# Altium PCB Group31 B_L D_T.PcbDoc (part 2 of 2)
Units mil, origin at the board's own origin, x right, y up, seen from the top; angles counter-clockwise.
Board outline 2519.68 x 3346.46 mil, 4 copper layers (Top Side, Ground Plane, Power Plane, Bottom Side), stack 33.234 mil thick; 87 components, 64 nets, 291 pads, 74 vias.
Unrouted connection lines stored in the file: 2.
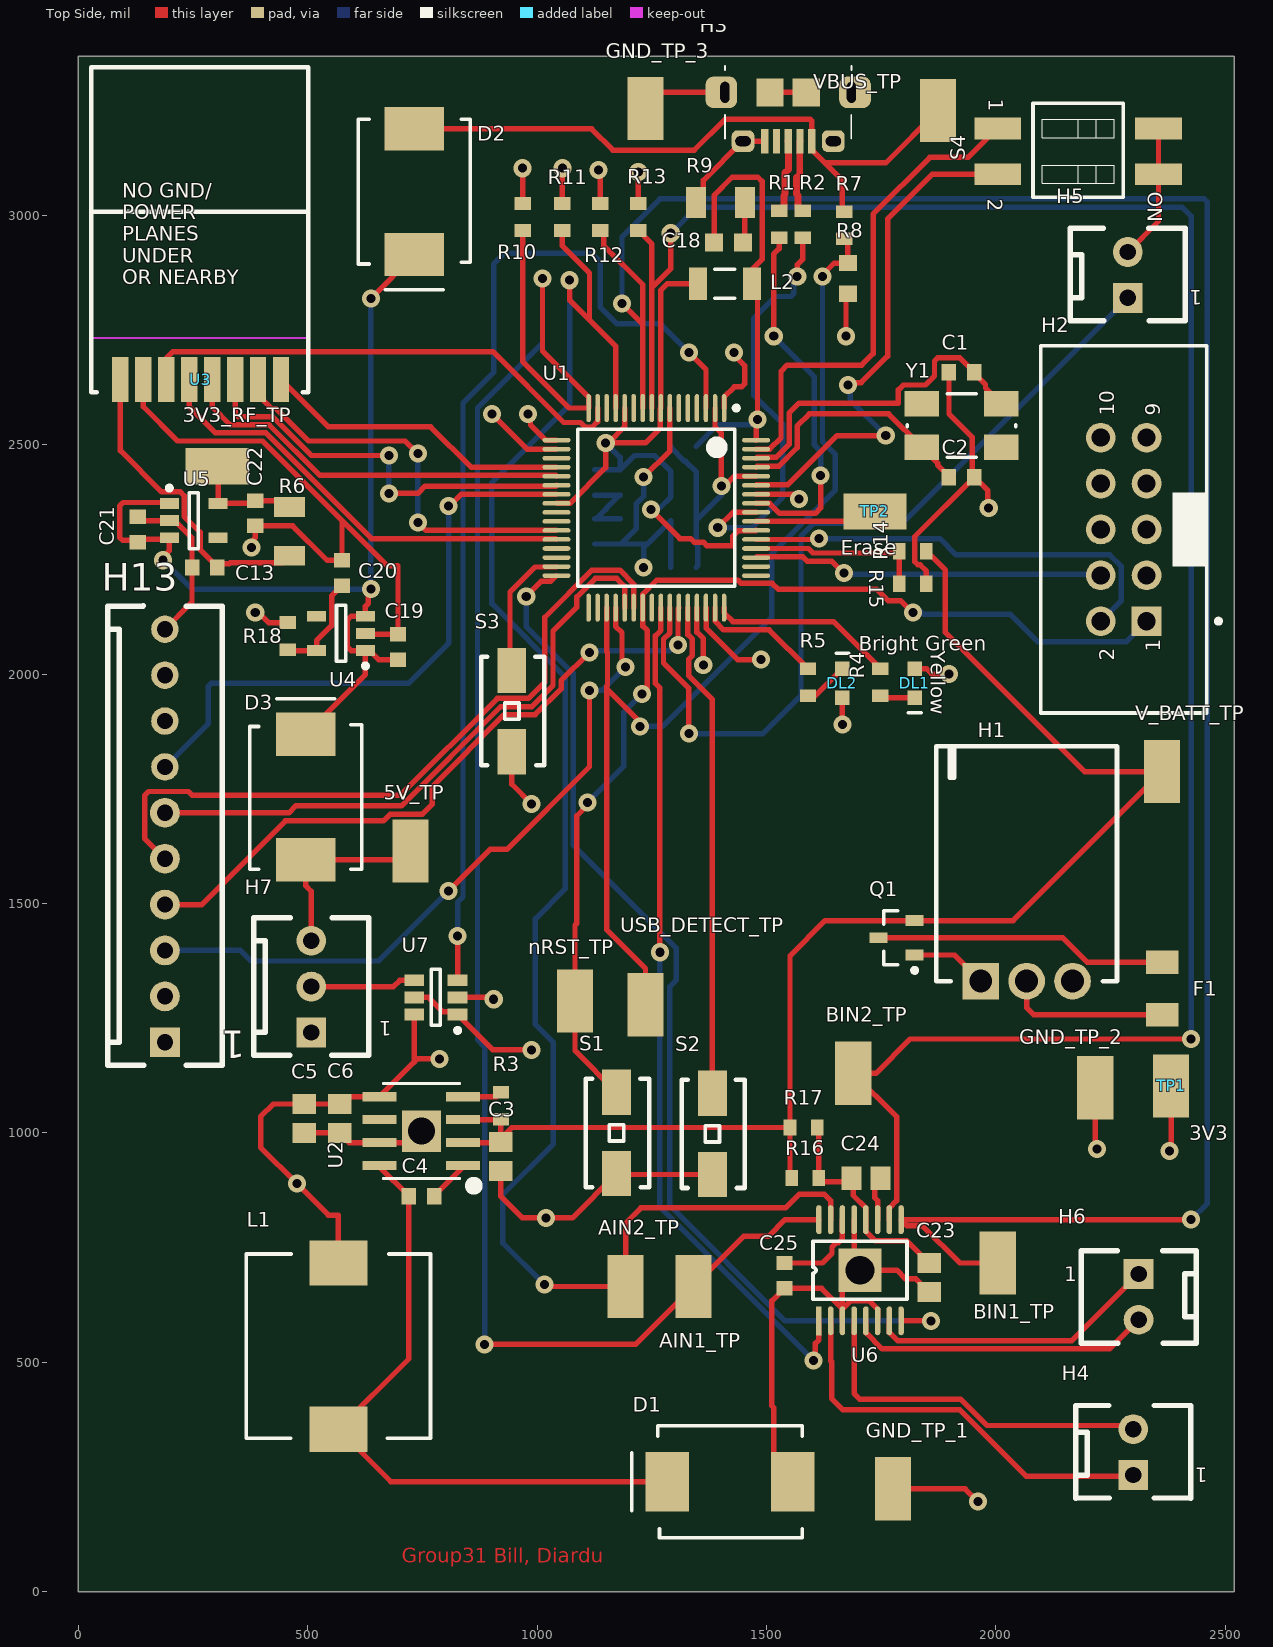
[diagram p0: Top Side view]

## Via types
v1: diameter 39.37, hole 19.68, Top Side to Bottom Side, 72 vias
v2: diameter 86.61, hole 62.99, Top Side to Bottom Side, 1 vias
v3: diameter 78.74, hole 59.06, Top Side to Bottom Side, 1 vias

## Nets (pads, with @x,y where several pads share a name; then routed paths per layer and width w, separated by ;. In a path a pad name is that pad's centre, name@x,y a point inside that pad or via, vN(x,y) a via of type N, cw(c..) or ccw(c..) an arc to the next point about the centre after c; other vN are vias at no path point) (continued)
USB_DETECT: (continued)
  Bottom Side w11.81: v1(1224.41,1885.83) 1272.89,1885.83 1511.81,2124.75 1511.81,2262.51 1649.61,2400.31 1649.61,2479.08 1622.05,2506.64 v1(1622.05,2866.14)
V_BAT: C3.2 Q1.2 R3.2 R14.2 R16.2 R17.2 U2.2 U2.3 V_BATT_TP.1 | length 3109.7
  Top Side w11.81: U2.2 919.88,978.94 C3.2 C3.2@921.26,988.19 ; U2.3 920.67,1028.94 R3.2 C3.2@921.26,988.19 ; R16.2 1551.18,905.51 R17.2 ; R14.2 1889.76,2226.38 1889.76,2090.55 2192.91,1787.4 V_BATT_TP.1 2037.4,1462.6 Q1.2 1627.95,1462.6 1551.18,1385.83 R17.2 ; C3.2@921.26,988.19 944.88,1011.81 R17.2
VBUS: D2.1 H3.1 R7.2 VBUS_TP.1 | length 1435.8
  Top Side w11.81: D2.1 1119.09,3187.99 1165.35,3141.73 1342.52,3141.73 1409.45,3208.66 1595.44,3208.66 1598.4,3205.71 1598.4,3161.45 1598.43,3142.72 1626.97,3114.17 ; R7.2 1665.35,3011.81 1665.35,3075.79 1626.97,3114.17 ; VBUS_TP.1 1759.84,3114.17 1626.97,3114.17
WKNP: S3.1 U1.31 | length 296.7
  Top Side w11.81: S3.1 940.94,2011.81 940.94,2178.4 995.81,2233.27 1041.34,2233.27 U1.31
pads on no net: H2.3 H2.9 H2.10 H3.4 H13.8 U1.4 U1.5 U1.6 U1.11 U1.14 U1.19 U1.25 U1.26 U1.29 U1.30 U1.33 U1.34 U1.40 U1.49 U1.50 U2.6 U4.4 U5.4 Y1.2 Y1.4

## Polygon pours and split planes (outlines as drawn)
GND on Ground Plane (split plane): 2499.59,20.1 20.1,20.1 20.1,3326.36 31.5,2744.09 606.3,2744.09 606.3,3322.83 23.62,3322.83 20.1,3326.36 2499.59,3326.36
3V3 on Power Plane (split plane): 2499.59,20.1 20.1,20.1 20.1,605.14 968.5,605.14 970.45,605.53 972.11,606.63 973.21,608.29 973.6,610.24 973.21,612.19 972.11,613.84 957.85,628.1 957.85,1673.23 957.47,1675.18 956.36,1676.83 873.68,1759.51 872.03,1760.62 870.08,1761 20.1,1761 20.1,3326.36 32.21,3326.36 28.68,3322.83 23.62,2744.09 606.3,2744.09 606.3,3326.36 2499.59,3326.36
5V on Power Plane (split plane): 947.66,1671.12 947.66,625.98 948.05,624.03 949.15,622.38 956.2,615.33 20.1,615.33 20.1,1749.11 21.8,1750.81 867.97,1750.81

## Other copper
Top Side:
  pour cut-out: 28.68,3322.83 598.43,3322.83 610.24,3311.02 610.24,2740.16 31.5,2740.16 27.56,2744.09
  text "Group31 Bill, Diardu" at 704.72,62.99 h31.5
Bottom Side:
  pour cut-out: 28.68,3322.83 606.3,3322.83 606.3,2740.16 27.56,2740.16 23.62,2744.09
Ground Plane (plane layer: these items are gaps in the copper):
  region: 539.37,3106.3
  pour cut-out: 20.1,3326.36 23.62,3322.83 606.3,3322.83 606.3,2744.09 31.5,2744.09
Power Plane (plane layer: these items are gaps in the copper):
  pour cut-out: 28.68,3322.83 32.62,3326.77 606.3,3326.77 606.3,2744.09 23.62,2744.09
  lines w10: 15.75,610.24 968.5,610.24 952.76,625.98 952.76,1673.23 870.08,1755.91 19.68,1755.91 15.75,1751.97

## Silkscreen, mask and mechanical layers (free items; w line width, h text height)
Board Outline:
  the board outline again, w10

## Dimensions
0,3385.83 to 2519.68,3385.83 on Mechanical 1
2559.06,3346.46 to 2559.06,0 on Mechanical 1

## Text inside footprints (layer, text, board x,y; h text height)
H2: Top Overlay "2" at 2257.87,2028.53 h31.5 r90; Top Overlay "1" at 2357.87,2048.21 h31.5 r90; Top Overlay "10" at 2257.87,2562.38 h31.5 r90; Top Overlay "9" at 2357.87,2562.38 h31.5 r90
H3: Mechanical 1 "PCB Edge" at 1631.89,3357.09 h31.5 r180
H4: Top Overlay "1" at 2461.67,270.65 h31.5 r180
H5: Top Overlay "1" at 2449.86,2836.18 h31.5 r180
H6: Top Overlay "1" at 2148.56,676.46 h31.5
H7: Top Overlay "1" at 682.87,1243.9 h31.5 r180
H13: Top Overlay "1" at 363.98,1222.64 h60 r180
S4: Top Overlay "ON" at 2330.71,3051.18 h31.5 r270; Top Overlay "1" at 1984.25,3253.94 h31.5 r270; Top Overlay "2" at 1982.28,3035.43 h31.5 r270
U2: Mechanical 13 "*" at 824.03,958.44 h31.5 r180
U3: Top Overlay "NO GND/ / POWER / PLANES / UNDER / OR NEARBY" at 95.61,2849.41 h31.5